# EAGLE board DRV8834 (EAGLE 6.5.0)
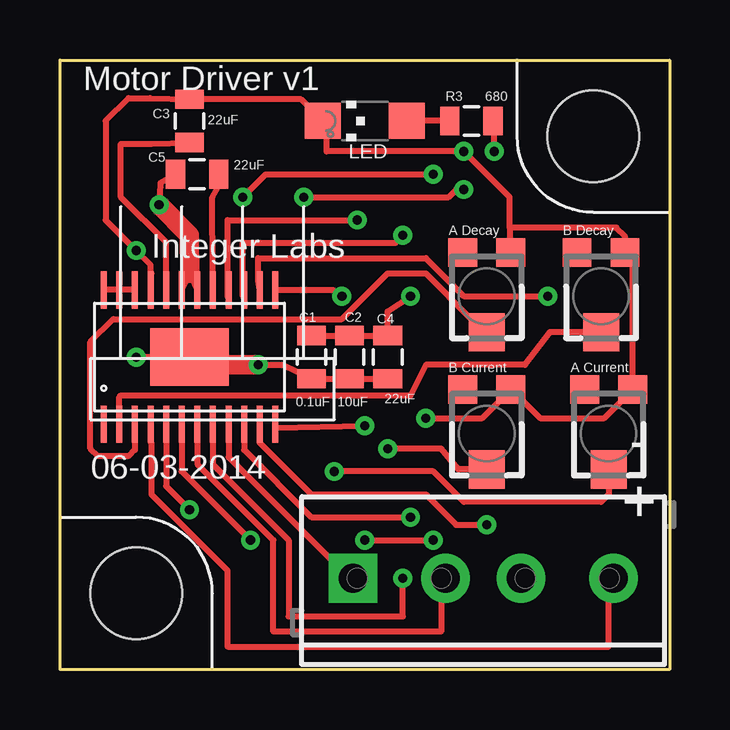
[diagram p0: board, top side]
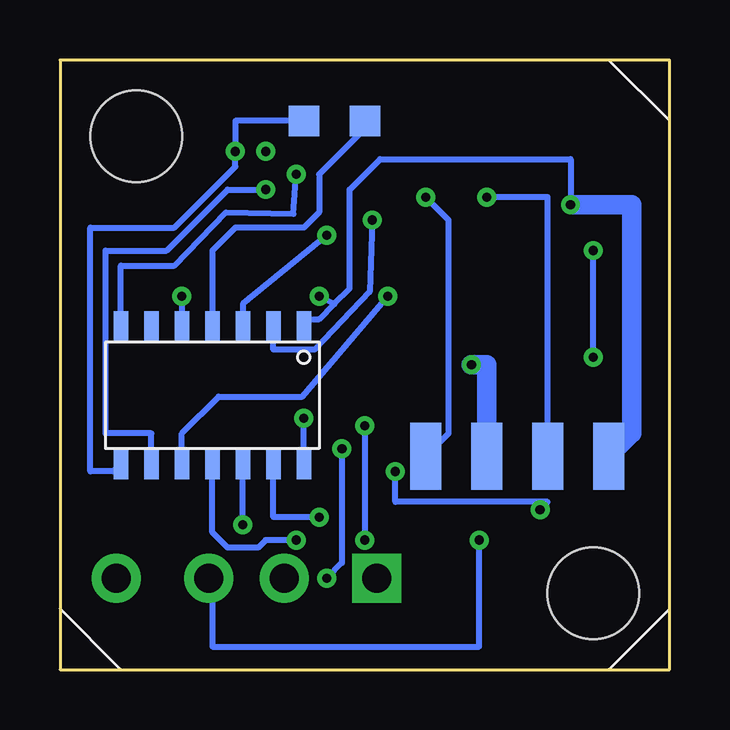
[diagram p1: board, bottom side, seen from below]

Size 25.4 x 25.4 mm. Coordinates in mm from the lower left corner, seen from the top.
Copper layers (1*16): Top 0.0178mm / dielectric 59mil / Bottom 0.0178mm
Design rules "SSC-EAGLE-2Lyr_v1.0.0.3": minimum track width 6mil, minimum drill 14mil, track to track 6mil, track to pad 6mil, pad to pad 6mil, via to via 6mil, smd to smd 6mil, copper to edge 20mil, drill to drill 16mil, minimum pad ring 8mil, minimum via ring 8mil, stop-mask expansion 3mil, vias tented up to drill 0mil, thermal gap 10mil

## Footprints (pad centres in the part's own frame; a part is rotated, then mirrored left to right if it is on the bottom)
0805 = smd 0.8 x 1.2: 1 -0.9,0; 2 0.9,0
SCREWTERMINAL-3.5MM-4_LOCK = drill 1.2 pad 2.032 square: 1 -0.178,0 | drill 1.2 pad 2.032: 2 3.678,0; 3 6.822,0; 4 10.678,0
CHIPLED_1206 = smd 1.5 x 1.5: A 0,-1.75; C 0,1.75
TC33X = smd 1.2 x 1.2: 1 -1,-1.825; 3 1,-1.825 | smd 1.5 x 1.6: 2 0,1.5
HTSSOP-24 = smd 0.25 x 1.55: 1 -3.575,-2.8; 2 -2.925,-2.8; 3 -2.275,-2.8; 4 -1.625,-2.8; 5 -0.975,-2.8; 6 -0.325,-2.8; 7 0.325,-2.8; 8 0.975,-2.8; 9 1.625,-2.8; 10 2.275,-2.8; 11 2.925,-2.8; 12 3.575,-2.8; 13 3.575,2.8; 14 2.925,2.8; 15 2.275,2.8; 16 1.625,2.8; 17 0.975,2.8; 18 0.325,2.8; 19 -0.325,2.8; 20 -0.975,2.8; 21 -1.625,2.8; 22 -2.275,2.8; 23 -2.925,2.8; 24 -3.575,2.8 | smd 3.28 x 2.4: PAD 0,0
SOIC14 = smd 0.61 x 1.27: 1 0,-3.175; 2 1.27,-3.175; 3 2.54,-3.175; 4 3.81,-3.175; 5 5.08,-3.175; 6 6.35,-3.175; 7 7.62,-3.175; 8 7.62,2.54; 9 6.35,2.54; 10 5.08,2.54; 11 3.81,2.54; 12 2.54,2.54; 13 1.27,2.54; 14 0,2.54
FOOTPRINT = smd 1.27 x 1.27 bottom: MISO 15.24,22.86; RESET 12.7,22.86 | smd 1.295 x 2.794 bottom: P$1 2.54,8.89; P$2 5.08,8.89; P$3 7.62,8.89; P$4 10.16,8.89 | hole 3.81: 22.225,22.225; 3.175,3.175

## Placement (x,y rotation side)
C1  0.1uF  [0805]  10.48,13.02 90 top
C2  10uF  [0805]  12.06,13.02 90 top
C3  22uF  [0805]  5.4,22.86 90 top
C4  22uF  [0805]  13.65,13.02 270 top
C5  22uF  [0805]  5.71,20.64 0 top
JP1  [SCREWTERMINAL-3.5MM-4_LOCK]  12.38,3.81 0 top
LED  blue  [CHIPLED_1206]  12.7,22.86 90 top
R3  680  [0805]  17.14,22.86 0 top
TM1  [TC33X]  22.54,15.56 180 top
TM2  [TC33X]  17.78,15.56 180 top
TM3  [TC33X]  22.86,9.84 180 top
TM4  [TC33X]  17.78,9.84 180 top
U$1  DRV8834  [HTSSOP-24]  5.4,13.02 0 top
U$3  TINY841  [SOIC14]  15.24,11.11 180 bottom
U$4  FOOTPRINT  [FOOTPRINT]  0,0 0 top

## Library data of the parts
C1 C2 = SparkFun-Capacitors
C3-C5 = SparkFun-Capacitors; PROD_ID: CAP-08402
JP1 = SparkFun-Connectors
LED = led
R3 = SparkFun-Passives
TM1-TM4 = adafruit
U$1 U$3 U$4 = IntegerLabs

## Nets
AOUT1: JP1.4 U$1.4
AOUT2: JP1.3 U$1.6
BOUT1: JP1.1 U$1.9
BOUT2: JP1.2 U$1.7
CONFIG: U$1.15 U$3.3
DIR/BPHASE: U$1.12 U$3.11
GND: C1.1 C2.1 C3.2 C4.2 LED.C TM1.1 TM2.1 TM3.1 TM4.1 U$1.21 U$1.PAD U$3.14 U$4.P$3
GPIO7: U$3.6
M0/APHASE: U$1.13 U$3.10
M1: U$1.14 U$3.5
MISO/LED: R3.2 U$3.8 U$4.MISO
N$5: LED.A R3.1
N$6: C5.2 U$1.17
N$10: TM1.2 U$1.2
N$11: TM2.2 U$1.3
N$12: C3.1 U$1.20
N$13: U$1.22 U$1.23 U$1.24
N$14: TM4.2 U$1.8
N$16: TM3.2 U$1.5
NENABLE/AENBL: U$1.10 U$3.13
NFAULT: U$1.16 U$3.2
NSLEEP: U$1.1
RESET: U$3.4 U$4.RESET
SCL/SCK: U$3.9 U$4.P$4
SDA/MOSI: U$3.7 U$4.P$2
STEP/BENBL: U$1.11 U$3.12
VCC: C1.2 C2.2 C4.1 C5.1 U$1.18 U$1.19 U$3.1 U$4.P$1

## Tracks (layer width: path | path; a pad name or v marks a point on that pad's centre or on a via)
AOUT1
  Top 0.254: U$1.4 3.77,9.49 3.81,9.45 3.81,7.3 6.99,4.13 6.99,0.95 22.86,0.95 22.86,3.17 JP1.4
AOUT2  (via drill 0.38)
  Top 0.254: U$1.6 5.07,8.26 v7.94,5.4
  Bottom 0.254: JP1.3 19.05,3.65 19.05,0.95 7.94,0.95 v7.94,5.4
BOUT1
  Top 0.254: U$1.9 7.02,8.85 11.43,4.45 JP1.1
BOUT2
  Top 0.254: JP1.2 15.88,3.68 15.88,1.59 8.89,1.59 8.89,5.4 5.72,8.56 U$1.7
CONFIG  (via drill 0.38)
  Top 0.254: U$1.15 7.62,15.55 7.62,17.78 13.97,17.78 v14.29,18.1
  Bottom 0.254: v14.29,18.1 17.78,15.24 U$3.3
DIR/BPHASE  (via drill 0.38)
  Top 0.254: v12.7,5.4 v15.56,5.4 | U$1.12 8.97,10.08 v12.7,10.16
  Bottom 0.254: v12.7,10.16 v12.7,5.4 | v15.56,5.4 16.83,5.4 17.14,5.08 18.41,5.08 19.05,5.71 U$3.11
GND  (via drill 0.38)
  Top 0.254: v15.24,10.48 17.59,10.48 TM4.1 18.81,11.67 20,10.48 22.67,10.48 TM3.1 23.86,16.75 TM1.1 23.54,18.05 23.18,18.41 18.73,18.41 | 18.73,18.41 18.73,17.78 18.86,17.78 TM2.1 | 3.81,16.51 U$1.21 3.77,16.86 v3.17,17.46 1.91,18.73 1.91,22.86 2.86,23.81 3.76,23.81 C3.2 10.05,23.76 LED.C | 10.79,22.7 LED.C | 18.73,18.41 18.73,19.68 v16.83,21.59 11.11,21.59 11.11,22.7 LED.C | 6.35,12.7 5.71,12.38 U$1.PAD v3.17,13.02 | v8.26,12.7 9.26,12.7 C1.1 C2.1 C4.2
  Top 0.813: 6.35,12.7 v8.26,12.7
  Bottom 0.254: U$3.14 v15.24,10.48 | v3.17,13.02 v3.17,17.46
  Bottom 0.813: U$4.P$3 7.62,12.7 v8.26,12.7
M0/APHASE  (via drill 0.38)
  Top 0.254: U$1.13 11.37,15.82 v11.75,15.56
  Bottom 0.254: U$3.10 20.32,9.84 18.79,11.37 15.3,11.37 v11.75,15.56
M1  (via drill 0.38)
  Top 0.254: U$1.14 8.26,16.2 8.26,17.14 15.24,17.14 16.83,15.56 v20.32,15.56
  Bottom 0.254: v20.32,15.56 U$3.5
MISO/LED  (via drill 0.38)
  Top 0.254: v18.1,21.59 18.1,22.49 R3.2
  Bottom 0.254: U$3.8 23.18,8.26 24.13,8.26 24.13,18.41 20.64,18.41 18.1,20.95 v18.1,21.59 18.1,22.86 U$4.MISO
N$5
  Top 0.254: R3.1 LED.A
N$6
  Top 0.254: U$1.17 6.37,16.49 6.35,19.68 6.67,20.27 C5.2
N$10
  Top 0.254: TM1.2 20.41,14.06 19.37,12.7 15.24,12.7 14.61,11.43 2.54,11.43 2.47,11.36 U$1.2
N$11
  Top 0.254: U$1.3 3.12,9.15 2.86,8.89 1.59,8.89 1.27,9.21 1.27,13.65 2.22,14.61 11.75,14.61 13.65,16.51 15.24,16.51 17.14,14.61 17.23,14.61 TM2.2
N$12
  Top 0.254: C3.1 3.81,21.91 2.54,21.91 2.54,19.68 4.42,17.8 U$1.20
N$13
  Top 0.254: U$1.22 U$1.23 U$1.24
N$14  (via drill 0.38)
  Top 0.254: TM4.2 16.6,8.34 15.88,9.21 v13.65,9.21 | v14.29,3.81 14.29,2.22 9.53,2.22 9.53,5.4 6.37,8.55 U$1.8
  Bottom 0.254: v13.65,9.21 13.65,4.45 v14.29,3.81
N$16  (via drill 0.38)
  Top 0.254: TM3.2 22.86,7.3 22.54,6.99 16.83,6.99 15.56,8.26 v11.43,8.26 | U$1.5 4.42,7.64 v5.4,6.67
  Bottom 0.254: v5.4,6.67 5.08,6.99 11.43,6.99 v11.43,8.26
NENABLE/AENBL  (via drill 0.38)
  Top 0.254: v14.61,6.35 10.48,6.35 7.67,9.15 U$1.10
  Bottom 0.254: v14.61,6.35 16.51,6.35 U$3.13
NFAULT  (via drill 0.38)
  Top 0.254: U$1.16 6.99,15.54 6.99,18.73 v12.38,18.73
  Bottom 0.254: v12.38,18.73 12.5,15.74 14.79,13.34 16.51,13.34 U$3.2
RESET
  Bottom 0.254: U$4.RESET 12.7,22.54 14.61,20.64 14.61,19.05 15.24,18.41 18.1,18.41 19.05,17.46 U$3.4
SCL/SCK  (via drill 0.38)
  Top 0.254: v10.16,19.68 16.19,19.68 16.51,20 v16.83,20
  Bottom 0.254: U$3.9 21.59,9.84 23.5,9.84 23.5,17.46 20.95,17.46 18.41,20 v16.83,20 | U$4.P$4 9.21,9.84 9.21,18.73 v10.16,19.68
SDA/MOSI  (via drill 0.38)
  Top 0.254: v7.62,19.68 8.57,20.64 v15.56,20.64
  Bottom 0.254: U$4.P$2 5.08,19.68 v7.62,19.68 | U$3.7 22.86,16.83 20.64,16.83 18.49,19.05 15.68,18.99 v15.56,20.64
STEP/BENBL  (via drill 0.38)
  Top 0.254: U$1.11 8.32,9.46 10.48,7.3 15.24,7.3 16.51,6.03 v17.78,6.03
  Bottom 0.254: v17.78,6.03 U$3.12
VCC  (via drill 0.38)
  Top 0.254: C5.1 4.18,20.27 v4.13,19.37 | U$1.19 5.4,16.51 U$1.18 | C1.2 C2.2 C4.1 13.65,14.92 v14.61,15.56
  Top 0.813: v4.13,19.37 5.39,18.11 5.4,16.51
  Bottom 0.254: U$3.1 15.24,14.61 14.61,14.61 13.97,15.24 | 13.97,15.24 13.34,15.88 13.34,20 12.06,21.27 4.13,21.27 v4.13,19.37 | v14.61,15.56 13.97,15.24
  Bottom 0.813: v4.13,19.37 1.59,19.37 1.59,9.84 U$4.P$1

## Text on the board
tPlace: Motor Driver v1 | A Decay | B Decay | Integer Labs | B Current | A Current | 06-03-2014
tNames: - | +